# Altium PCB DAC_Board_PCB.PcbDoc
Units mm, origin at the board's own origin, x right, y up, seen from the top; angles counter-clockwise.
Board outline 60 x 23.5 mm, 2 copper layers (Top Layer, Bottom Layer); 37 components, 24 nets, 121 pads, 69 vias.
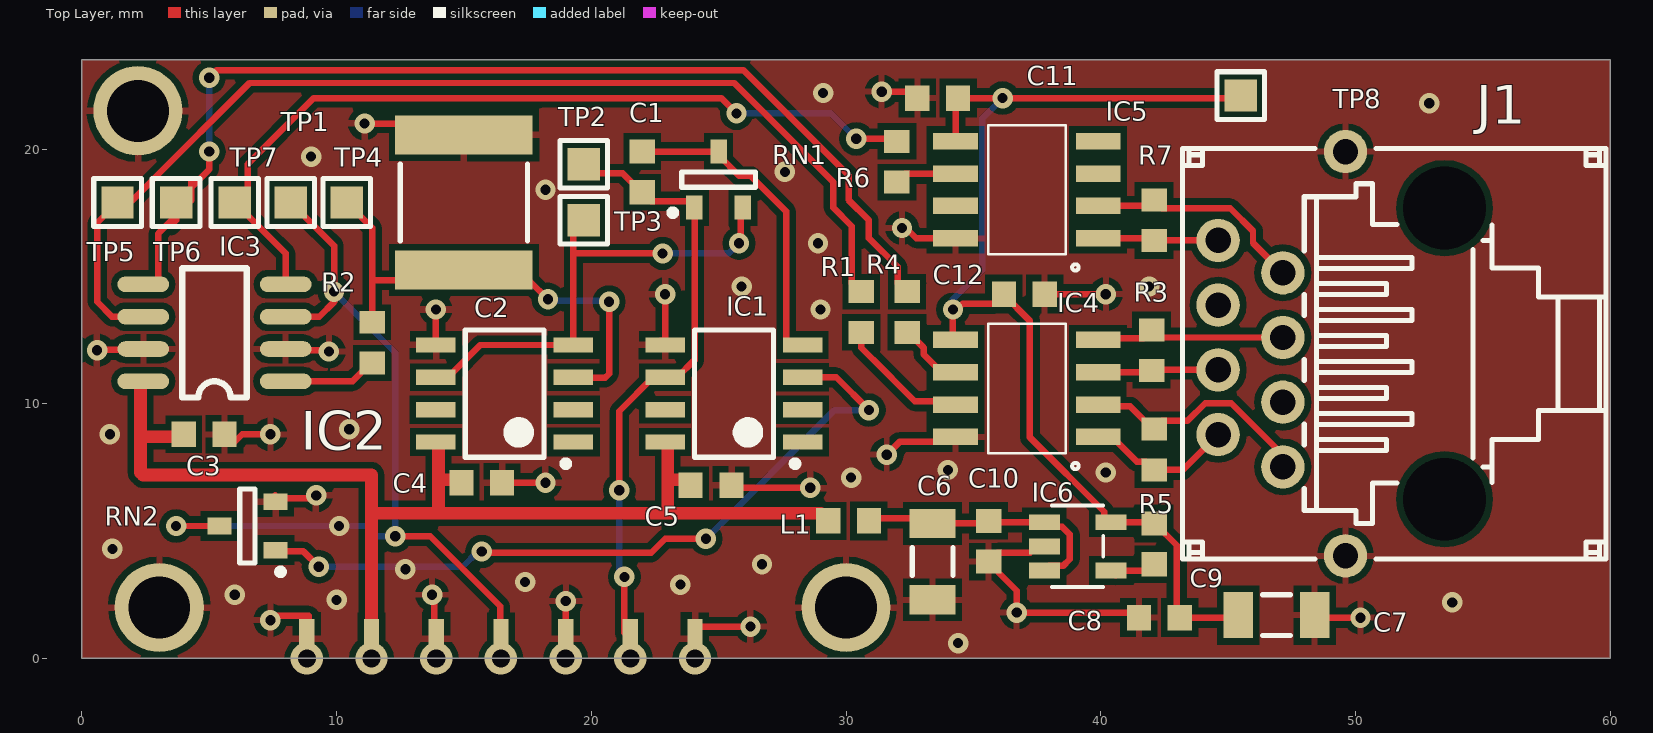
[diagram p0: Top Layer view]
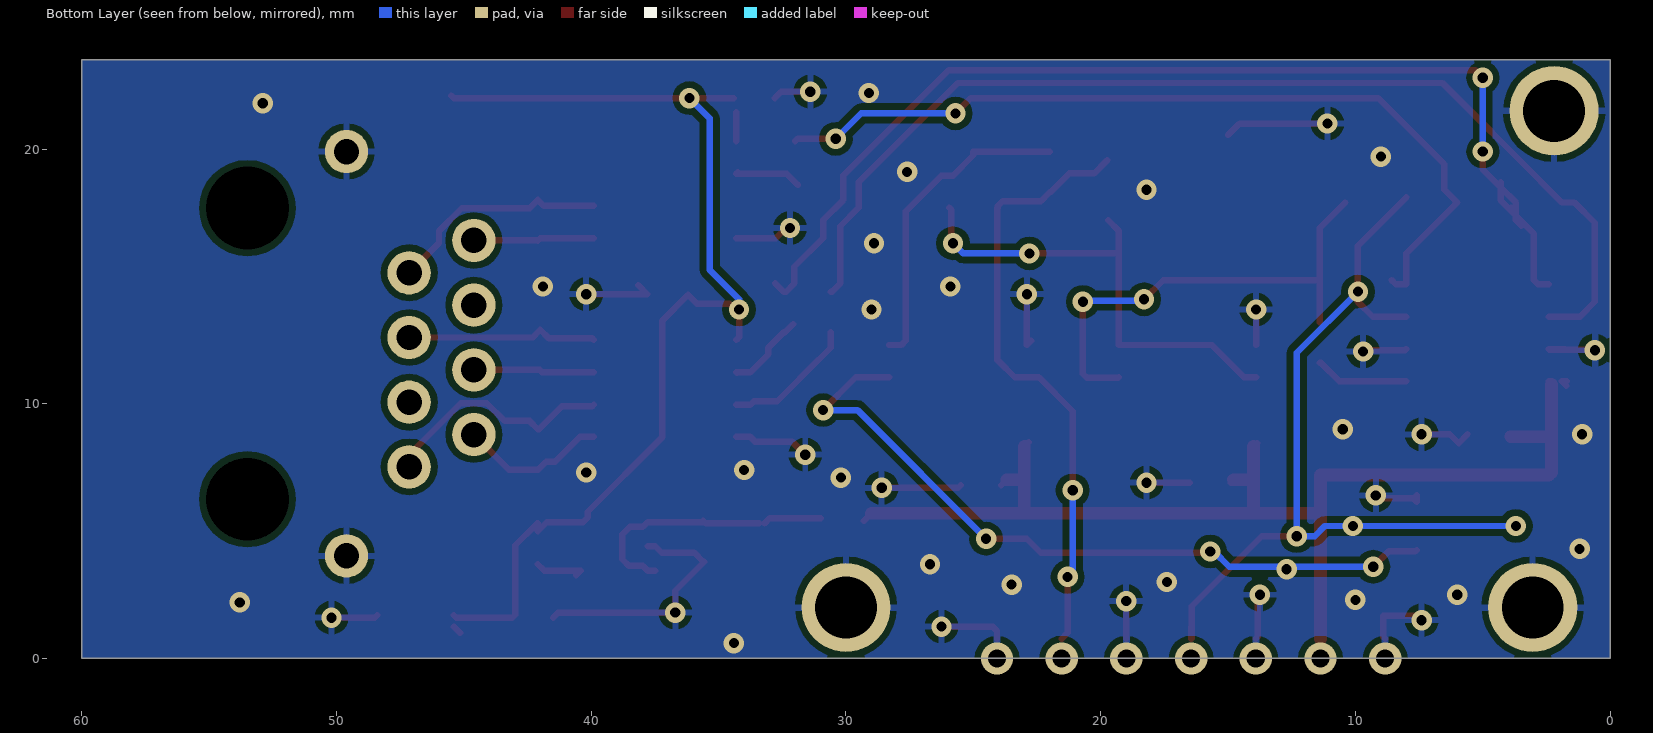
[diagram p1: Bottom Layer view, seen from below]
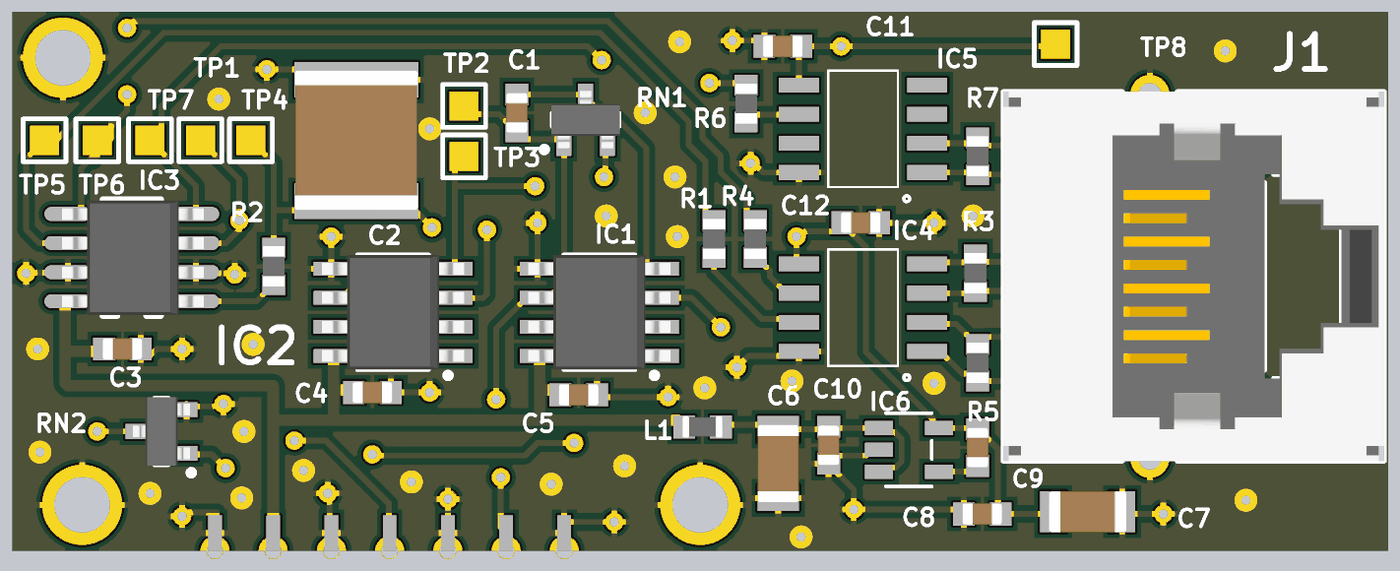
[diagram p2: 3D render of the assembled board from above, using the file's embedded part models]

## Layer stack, top to bottom
Top Solder: solder mask 0.0102, Solder Resist, Dk 3.5
Top Layer: signal copper 0.0356
Dielectric 1: dielectric 0.32, FR-4, Dk 4.8
Bottom Layer: signal copper 0.0356
Bottom Solder: solder mask 0.0102, Solder Resist, Dk 3.5

## Board outline
0,0 60,0 60,23.5 0,23.5

## Design rules (kind name [scope] priority, off if disabled: settings)
Clearance [All] p1: gap=0.254 ignorepadtopadclearanceinfootprint=FALSE except(0: Arc-Hole Track-Hole SMDPad-Hole THPad-Hole Via-Hole Fill-Hole Poly-Hole Region-Hole Text-Hole)
PolygonConnect [All] p1: connectstyle=Relief reliefconductorwidth=0.254 reliefentries=4 polygonreliefangle="90 Angle" airgapwidth=0.254
RoutingVias [All] p1: holewidth=0.711 width=1.27 viastyle="Through Hole" minholewidth=0.711 minwidth=1.27 maxholewidth=0.711 maxwidth=1.27
SolderMaskExpansion [All] p1: expansion=0.102
Width [All] p1: maxlimit=0.254 minlimit=0.254 preferedwidth=0.254
30 further rules are at their usual default settings.

## Components (designator, comment, footprint, x,y, rotation, side; value= is the part's Value field where it differs from the comment)
C1 "8.2pF" CAPC1608X87N 22,19.1 r270 top
C2 "10 uF" CAPC5750X279N 15,17.9 r270 top
C3 "100nF" CAPC1608X87N 4.8,8.8 r180 top
C4 "100nF" CAPC1608X87N 15.7,6.9 r180 top
C5 "100nF" CAPC1608X87N 24.7,6.8 r180 top
C6 "10uF" CAPC3216X180N 33.4,3.8 r90 top
C7 "10uF" CAPC3216X180N 46.9,1.7 r180 top
C8 "100nF" CAPC1608X87N 42.3,1.6 r0 top
C9 "10nF" CAPC1608X87N 42.1,4.5 r90 top
C10 "100nF" CAPC1608X87N 35.6,4.6 r90 top
C11 "100nF" CAPC1608X87N 33.6,22 r0 top
C12 "100nF" CAPC1608X87N 37,14.3 r180 top
IC1 "LT1667" SOIC127P600X175-8N 25.6,10.4 r180 top
IC2 "LT1667" SOIC127P600X175-8N 16.6,10.4 r180 top
IC3 "AD5541" AD5541 5.1,12.3 r180 top
IC4 "FIN1028MX" FIN1028MX 37.1,10.6 r180 top
IC5 "FIN1028MX" FIN1028MX 37.1,18.4 r180 top
IC6 "LT1761ES5-3.3#TRPBF" LDO 39.1,4.4 r0 top
J1 "RJ45" TYCO_6368150-1 45.88,11.965 r90 top
L1 "120R@100MHz" INDC1608X95N 30.1,5.4 r180 top
R1 "100" RESC1608X55N 30.6,13.6 r270 top
R2 "0" RESC1608X55N 11.4,12.4 r90 top
R3 "100" RESC1608X55N 42,12.1 r90 top
R4 "100" RESC1608X55N 32.4,13.6 r270 top
R5 "100" RESC1608X55N 42.1,8.2 r90 top
R6 "100" RESC1608X55N 32,19.5 r270 top
R7 "100" RESC1608X55N 42.1,17.2 r90 top
RN1 "=Value" SOT95P230X112-3N 25,18.8 r90 top
RN2 "=Value" SOT95P230X112-3N 6.5,5.2 r180 top
TP1 "Test Point" TPS127 8.2,17.9 r0 top
TP2 "Test Point" TPS127 19.7,19.4 r0 top
TP3 "Test Point" TPS127 19.7,17.2 r0 top
TP4 "Test Point" TPS127 10.4,17.9 r0 top
TP5 "Test Point" TPS127 1.4,17.9 r0 top
TP6 "Test Point" TPS127 3.7,17.9 r0 top
TP7 "Test Point" TPS127 6,17.9 r0 top
TP8 "Test Point" TPS127 45.5,22.1 r0 top

## Footprints (in the part's own frame and the unit in brackets; to place one, negate y for a bottom-side part, rotate by r counter-clockwise, add the part's x,y. Pads: shape width x height; smd on the part's side, far side on the other; paste and mask are expansions set on the pad)
AD5541 [mil] "AD5541LRZ DAC"
  oval 80x24 smd: 1(-114.17,55.95) 2(-114.17,5.95) 3(-114.17,-44.05) 4(-114.17,-94.05) 5(105.83,-94.05) 6(105.83,-44.05) 7(105.83,5.95) 8(105.83,55.95)
  silkscreen extent -54,-119 46,81, body extent -128,-117 116,80, height 69
CAPC1608X87N [mm] "Chip Capacitor, Body 1.6x0.8mm IPC Medium Density"
  rect 0.95x1 smd: 1(-0.8,0) 2(0.8,0)
  body extent -0.87,-0.47 0.88,0.48, height 0.87
CAPC3216X180N [mm] "Chip Capacitor, Body 3.2x1.6mm, IPC Medium Density"
  rect 1.15x1.8 smd: 1(-1.5,0) 2(1.5,0)
  silkscreen extent -0.55,-0.8 0.55,0.8, body extent -1.7,-0.9 1.7,0.9, height 1.8
CAPC5750X279N [mm] "Chip Capacitor, 2-Leads, Body 5.7x5.0mm, IPC Medium Density"
  rect 1.55x5.4 smd: 1(-2.65,0) 2(2.65,0)
  silkscreen extent -1.5,-2.5 1.5,2.5, body extent -3.05,-2.7 3.05,2.7, height 2.79
FIN1028MX [mm] "LDVS to TTL"
  rect 1.75x0.65 smd: 1(-2.8,1.905) 2(-2.8,0.635) 3(-2.8,-0.635) 4(-2.8,-1.905) 5(2.8,-1.905) 6(2.8,-0.635) 7(2.8,0.635) 8(2.8,1.905)
  silkscreen extent -2.03,-2.54 1.52,3.17
INDC1608X95N [mm] "Chip Inductor, 2-Leads, EIA 0603, Metric 1608, Body 1.6x0.8mm, IPC Medium Density"
  rect 0.95x1 smd: 1(-0.8,0) 2(0.8,0)
  body extent -0.87,-0.47 0.88,0.48, height 0.95
LDO [mm] "3.3 V LDO"
  rect 1.22x0.62 smd: 1(-1.31,0.95) 2(-1.31,0) 3(-1.31,-0.95) 4(1.31,-0.95) 5(1.31,0.95)
  silkscreen extent -1.01,-1.6 1,1.6
RESC1608X55N [mm] "Chip Resistor, EIA 0603, Metric 1608, Body 1.6x0.8mm, IPC Medium Density"
  rect 0.9x1 smd: 1(-0.8,0) 2(0.8,0)
  body extent -0.87,-0.47 0.88,0.48, height 0.55
SOIC127P600X175-8N [mm] "SOIC 8, Pitch 1.27mm - Body 4x5mm, IPC Medium Density"
  rect 1.55x0.6 smd: 1(-2.7,1.905) 2(-2.7,0.635) 3(-2.7,-0.635) 4(-2.7,-1.905) 5(2.7,-1.905) 6(2.7,-0.635) 7(2.7,0.635) 8(2.7,1.905)
  silkscreen extent -2.53,-2.5 1.55,2.88, body extent -3.1,-2.5 3.1,2.5, height 1.75
SOT95P230X112-3N [mm] "SOT23 3-Leads, Pitch 0.95mm - Body 1.3x2.86mm, IPC Medium Density"
  rect 0.95x0.65 smd: 1(-1.1,0.95) 2(-1.1,-0.95) 3(1.1,0)
  silkscreen extent -1.42,-1.45 0.3,1.92, body extent -1.25,-1.5 1.25,1.5, height 1.1
TPS127 [mm] "1.27 x  1.27mm SMD Test Point Area"
  rect 1.27x1.27 smd paste-1.27: 1(0,0)
  silkscreen extent -0.94,-0.94 0.94,0.94
TYCO_6368150-1 [mm] "1 Port RJ45, Straight"
  round 1.7 hole 1: 1(-4.445,-1.27) 2(-3.175,1.27) 3(-1.905,-1.27) 4(-0.635,1.27) 5(0.635,-1.27) 6(1.905,1.27) 7(3.175,-1.27) 8(4.445,1.27) SHIELD(-7.935,-3.73) SHIELD(7.935,-3.73)
  round 0.5 hole 3.25 unplated mask+1.375: M1(5.715,-7.62) M2(-5.715,-7.62)
  silkscreen extent -8.06,-13.96 8.06,2.67, body extent -8.06,-13.96 8.06,2.67, height 16.82

## Part data
C1: library part CC0603_8.2PF_50V_0.5PF_NP0, "Non-polarised capacitor", Case=0603, Manufacturer=GENERIC, Manufacturer1 ComponentHeight=0.87mm, Manufacturer1 Example=PHYCOMP, Manufacturer1 Part Number=223886715828, Tolerance=±0.5pF, Voltage=50V, Author="CERN DEM JLC", Component Type=Standard, CreateDate=03/12/2007, HelpURL=\\cern.ch\dfs\Applications\Altium\Datasheets\CC0603_NP0_PHYCOMP.pdf, LatestRevisionDate=03/12/2007, Manufacturer Part Number=CC0603_8.2PF_50V_0.5PF_NP0, Mounted=Yes, Part Description="SMD Multilayer Chip Ceramic Capacitor", Part Number=CC0603_8.2PF_50V_0.5PF_NP0, Pin Count=2, Sense=No, SMD=Yes, Socket=No, Status=Preferred, TC=C0G/NP0
C2: library part CAPF2220_10uF_35V_20%
C3 C4 C5 C8 C10 C11 C12: library part CC0603_100NF_50V_10%_X7R, "Non-polarised capacitor", Case=0603, Manufacturer=GENERIC, Manufacturer1 ComponentHeight=0.87mm, Manufacturer1 Example=PHYCOMP, Manufacturer1 Part Number=223858615649, Tolerance=±10%, Voltage=50V, Author="CERN DEM JLC", Component Type=Standard, CreateDate=12/3/2007, HelpURL=\\cern.ch\dfs\Applications\Altium\Datasheets\CC0603_X7R_PHYCOMP.pdf, LatestRevisionDate=12/3/2007, Manufacturer Part Number=CC0603_100NF_50V_10%_X7R, Mounted=Yes, Part Description="SMD Multilayer Chip Ceramic Capacitor", Part Number=CC0603_100NF_50V_10%_X7R, Pin Count=2, Sense=No, SMD=Yes, Socket=No, Status=Preferred, TC=X7R
C6 C7: library part CC1206_10UF_25V_10%_X7R, "Non-polarised capacitor", Case=1206, Manufacturer=GENERIC, Manufacturer1 ComponentHeight=1.8mm, Manufacturer1 Example=KEMET, Manufacturer1 Part Number=C1206C106K4RACTU, Manufacturer Part Number=CC1206_10uF_25V_10%_X7R, Tolerance=±10%, Voltage=25V, Author="CERN DEM JLC", Component Type=Standard, CreateDate=12/09/2012, HelpURL=\\cern.ch\dfs\Applications\Altium\Datasheets\CC1206_X7R_KEMET.pdf, LatestRevisionDate=12/09/2012, Mounted=Yes, Part Description="SMD Multilayer Chip Ceramic Capacitor", Part Number=CC1206_10UF_25V_10%_X7R, Pin Count=2, Sense=No, SMD=Yes, Socket=No, Status=Preferred, TC=X7R
C9: library part CC0603_10NF_50V_10%_X7R, "Non-polarised capacitor", Case=0603, Manufacturer=GENERIC, Manufacturer1 ComponentHeight=0.87mm, Manufacturer1 Example=PHYCOMP, Manufacturer1 Part Number=223858615636, Tolerance=±10%, Voltage=50V, Author="CERN DEM JLC", Component Type=Standard, CreateDate=12/3/2007, HelpURL=\\cern.ch\dfs\Applications\Altium\Datasheets\CC0603_X7R_PHYCOMP.pdf, LatestRevisionDate=12/3/2007, Manufacturer Part Number=CC0603_10NF_50V_10%_X7R, Mounted=Yes, Part Description="SMD Multilayer Chip Ceramic Capacitor", Part Number=CC0603_10NF_50V_10%_X7R, Pin Count=2, Sense=No, SMD=Yes, Socket=No, Status=Preferred, TC=X7R
IC1 IC2: "0-5 V Rail to Rail op amp"
IC3: "16 bit serial DAC", Supplier 1=Digi-Key
IC4 IC5: "LVDS to TTL"
IC6: "3.3 V LDO"
J1: library part TYCO_6368150-1, "Connector RJ45 + Shield", Manufacturer="TYCO ELECTRONICS", Manufacturer Part Number=6368150-1, Author="CERN DEM MR", ComponentHeight=17.02mm, Component Type=Standard, CreateDate=6/18/2019, Family=RJ45, HelpURL=\\cern.ch\dfs\Applications\Altium\Datasheets\TYCO_6368150-1.pdf, LatestRevisionDate=6/18/2019, Mounted=Yes, Part Description="RJ45 Connector, 1 Port, 8 Positions, Shielded, Straight, Category 5", Part Number=TYCO_6368150-1, Pin Count=10, PressFit=No, Sense=No, SMD=No, Socket=No, Status=None
L1: library part IND0603_MURATA_BLM18PG121SN1D, "Inductor", Case=0603, Manufacturer=MURATA, Manufacturer Part Number=BLM18PG121SN1D, Power=2A, Resistance=0.05R, Author="CERN DEM BC", ComponentHeight=0.95mm, Component Type=Standard, CreateDate=27/07/2015, HelpURL=\\cern.ch\dfs\Applications\Altium\Datasheets\IND0603_MURATA_BLM18P.pdf, LatestRevisionDate=27/07/2015, Mounted=Yes, Part Description="SMD EMIFIL Chip Ferrite Bead", Part Number=IND0603_MURATA_BLM18PG121SN1D, Pin Count=2, Sense=No, SMD=Yes, Socket=No, Status=None
R1 R3 R4 R5 R6 R7: library part R0603_100R_1%_0.1W_100PPM, "Resistor - 1%", Case=0603, Manufacturer=GENERIC, Manufacturer1 ComponentHeight=0.55mm, Manufacturer1 Example="NIC COMPONENT", Manufacturer1 Part Number=NRC06F4700TRF, Power=0.1W, Tolerance=±1%, Author="CERN DEM JLC", Component Type=Standard, CreateDate=12/3/2007, HelpURL=\\cern.ch\dfs\Applications\Altium\Datasheets\R0603_NIC_NRC.pdf, LatestRevisionDate=3/13/2008, Manufacturer Part Number=R0603_100R_1%_0.1W_100PPM, Mounted=Yes, Part Description="General Purpose Thick Film Chip Resistor", Part Number=R0603_100R_1%_0.1W_100PPM, Pin Count=2, PressFit=No, Sense=No, SMD=Yes, Socket=No, Status=Preferred, TC=±100ppm/°C
R2: library part R0603_0R_JUMPER, "Resistor", Case=0603, Manufacturer=GENERIC, Manufacturer1 ComponentHeight=0.55mm, Manufacturer1 Example="NIC COMPONENT", Manufacturer1 Part Number=NRC06Z0, Author="CERN DEM JLC", Component Type=Standard, CreateDate=12/3/2007, HelpURL=\\cern.ch\dfs\Applications\Altium\Datasheets\R0603_NIC_NRC.pdf, LatestRevisionDate=3/13/2008, Manufacturer Part Number=R0603_0R_JUMPER, Mounted=Yes, Part Description="1A (0.05R Max DC Resistance) Zero Ohm Jumper", Part Number=R0603_0R_JUMPER, Pin Count=2, PressFit=No, Sense=No, SMD=Yes, Socket=No, Status=Preferred
RN1: library part RN_1k_10k_VISHAY_MPMT10011002AT1, "Resistor Network Divider - 0.1%"
RN2: library part RN_1k_20k_VISHAY_MPMT10012002AT1, "Resistor Network Divider - 0.1%"
TP1 TP2 TP3 TP4 TP5 TP6 TP7 TP8: library part SMD_PAD_1.27X1.27MM, Author="CERN DEM JLC", ComponentHeight=0mm, Component Type="Standard (No BOM)", Family="Test Point", HelpURL=Undefined, Mounted=No, PackageDescription="1.27mm x 1.27mm PCB Copper Area (SMD Test Point)", Part Description="1.27mm x 1.27mm PCB Copper Area (SMD Test Point)", Part Number=SMD_PAD_1.27X1.27MM, Pin Count=1, Sense=No, Socket=No, Status=None
  TP1 TP2: CreateDate=12/01/2008, LatestRevisionDate=12/01/2008, SMD=Yes
  TP3 TP4 TP5 TP6 TP7 TP8: CreateDate=1/12/2008, LatestRevisionDate=1/12/2008, SMD=No

## Free pads (board coordinates)
  round 3.5 hole 2.43: 1(2.2,21.5) 1(3.04,2) 1(30,2)
  rect 0.6x1.55 smd: 6(8.832,0.775) 7(11.372,0.775) 8(13.912,0.775) 9(16.452,0.775) 10(18.992,0.775) 11(21.532,0.775) 12(24.072,0.775)

## Via types
v1: diameter 0.8, hole 0.4, Top Layer to Bottom Layer, 62 vias
v2: diameter 1.27, hole 0.711, Top Layer to Bottom Layer, 7 vias

## Nets (pads, with @x,y where several pads share a name; then routed paths per layer and width w, separated by ;. In a path a pad name is that pad's centre, name@x,y a point inside that pad or via, vN(x,y) a via of type N, cw(c..) or ccw(c..) an arc to the next point about the centre after c; other vN are vias at no path point)
GND: C2.1 C3.1 C4.1 C5.1 C6.1 C7.1 C8.1 C10.1 C11.1 C12.1 IC1.5 IC2.5 IC3.2 IC3.7 IC4.8 IC5.8 IC6.2 J1.SHIELD pad.1 pad.6 pad.8 pad.10 pad.12 RN2.2 | length 50.7
  Top Layer w0.254: v1(0.6,12.1) 0.624,12.124 2.388,12.124 IC3.7 IC3.7@1.776,12.149 ; C3.1@5.7,8.7 C3.1 5.6,8.797 5.948,8.449 6.299,8.8 v1(7.4,8.8) v1@7.4,8.74 ; v1(7.4,1.5) 7.577,1.677 8.916,1.677 8.916,0.859 pad.6 ; RN2.2@7.6,6.4 RN2.2 7.746,6.296 9.096,6.296 v1(9.2,6.4) ; IC3.2 8.049,12.099 9.651,12.099 v1(9.7,12.05) ; v1(11.1,21) 14.55,21 C2.1 ; v1(13.75,2.5) 13.831,2.419 13.831,0.856 pad.8 ; IC2.5 v1(13.9,13.7) ; C4.1 v1(18.2,6.9) ; pad.10 18.996,0.779 18.996,2.246 v1(19,2.25) ; IC1.5@22.727,12.478 IC1.5 v1(22.9,14.3) ; pad.12 24.072,1.077 24.245,1.25 v1(26.25,1.25) ; C5.1 25.6,6.7 v1(28.6,6.7) ; v1(31.4,22.25) 32.55,22.25 C11.1 ; v1(31.6,8) 32.1,8.5 33.555,8.5 33.75,8.695 IC4.8 ; v1(32.2,16.9) 32.348,16.9 32.753,16.495 IC5.8 ; C10.1@35.567,3.792 36.7,2.659 v1(36.7,1.8) 41.3,1.8 C8.1 ; C10.1 35.948,4.148 37.238,4.148 37.49,4.4 IC6.2 ; C12.1@38.148,14.648 C12.1 v1(40.2,14.3) ; C7.1 48.5,1.6 v1(50.2,1.6) ; J1.SHIELD@49.61,19.9 J1.SHIELD@49.68,19.97
  other v1: 34.4,0.6 53.8,2.2 10,2.3 6,2.5 23.5,2.9 17.4,3 26.7,3.7 1.2,4.3 30.2,7.1 40.2,7.3 34,7.4 1.1,8.8 10.5,9 29,13.7 25.9,14.6 41.9,14.6 28.9,16.3 18.2,18.4 27.6,19.1 9,19.7 52.9,21.8 29.1,22.2
  other v2: 8.832,0 13.912,0 18.992,0 24.072,0
NetC1_1: C1.1 IC1.4 RN1.3 | length 12.5
  Top Layer w0.254: C1.1 RN1.3 25,19.75 25.808,18.942 26.258,18.942 27.652,17.548 27.652,12.478 27.825,12.305 IC1.4
NetC1_2: C1.2 IC1.6 pad.11 RN1.1 TP2.1 | length 24
  Top Layer w0.254: TP2.1@19.75,19.55 20.258,19.042 21.233,19.042 21.975,18.3 C1.2 22.348,17.952 23.852,17.952 24.05,17.754 RN1.1 24.056,17.694 24.056,11.716 23.375,11.035 IC1.6 22.425,11.035 21.1,9.71 v1(21.1,6.6) ; v1(21.3,3.2) 21.3,1.007 pad.11
  Bottom Layer w0.254: v1(21.1,6.6) 21.1,3.4 v1(21.3,3.2)
  other v2: 21.532,0
NetC6_2: C6.2 C10.2 IC6.1 IC6.3 L1.1 | length 10.4
  Top Layer w0.254: L1.1@31,5.5 33,5.5 C6.2@33.2,5.3 ; C6.2 35.5,5.3 C10.2 35.65,5.35 IC6.1 37.973,5.167 38.482,5.167 38.781,4.868 38.781,3.891 38.523,3.633 37.973,3.633 IC6.3 IC6.3@37.49,3.45
NetC9_1: C9.1 IC6.4 | length 2.1
  Top Layer w0.254: IC6.4@40.593,3.267 IC6.4 41.85,3.45 C9.1
NetIC1_3: IC1.3 RN2.1 | length 29.3
  Top Layer w0.254: RN2.1 7.65,4.2 8.7,4.2 v1(9.3,3.6) ; v1(15.7,4.2) 15.75,4.15 22.35,4.15 22.9,4.7 v1(24.5,4.7) ; IC1.3 29.615,11.035 v1(30.9,9.75)
  Bottom Layer w0.254: v1(9.3,3.6) 14.952,3.6 15.552,4.2 v1(15.7,4.2) ; v1(24.5,4.7) 29.55,9.75 v1(30.9,9.75)
NetIC3_1: IC3.1 R2.1 | length 3.7
  Top Layer w0.254: IC3.1 10.629,10.879 11.35,11.6 R2.1
NetIC4_1: IC4.1 J1.2 R5.1 | length 5.8
  Top Layer w0.254: IC4.1 40.45,8.695 41.422,7.723 41.777,7.723 R5.1 43.22,7.4 J1.2
NetIC4_2: IC4.2 J1.1 R5.2 | length 9.4
  Top Layer w0.254: IC4.2 39.971,9.894 41.156,9.894 42.05,9 R5.2 42.423,9.323 43.402,9.323 44.1,10.021 45.12,10.021 46.873,8.268 46.873,7.797 J1.1
NetIC4_3: IC4.3 J1.4 R3.1 | length 4.7
  Top Layer w0.254: IC4.3 41.935,11.235 R3.1 42.03,11.33 J1.4
NetIC4_4: IC4.4 J1.5 R3.2 | length 7.5
  Top Layer w0.254: IC4.4 39.972,12.577 41.677,12.577 R3.2 42.3,12.6 J1.5
NetIC4_6: IC4.6 R4.2 | length 3.2
  Top Layer w0.254: R4.2@32.077,13.123 R4.2 32.45,12.8 33.044,12.206 33.044,11.941 33.75,11.235 IC4.6 IC4.6@34.29,11.225
NetIC4_7: IC4.7 R1.2 | length 5.2
  Top Layer w0.254: R1.2 30.6,12.2 31.48,11.32 32.15,10.65 32.7,10.1 33.615,10.1 33.75,9.965 IC4.7
NetIC5_1: IC5.1 J1.8 R7.1 | length 4.9
  Top Layer w0.254: IC5.1 42.005,16.495 R7.1 42.11,16.41 J1.8 J1.8@44.518,16.502
NetIC5_2: IC5.2 J1.7 R7.2 | length 8.8
  Top Layer w0.254: IC5.2 41.865,17.765 R7.2 42.423,17.677 45.084,17.677 45.979,16.782 45.979,16.311 J1.7
NetIC5_6: IC5.6 R6.2 | length 2.7
  Top Layer w0.254: R6.2@31.888,18.587 R6.2 32.323,19.023 34.288,19.023 IC5.6 IC5.6@34.243,19.092
P3V3: C7.2 C8.2 C9.2 C11.2 C12.2 IC4.5 IC5.5 IC6.5 TP8.1 | length 44.2
  Top Layer w0.254: IC4.5 34.2,12.605 v1(34.2,13.7) 34.348,13.7 34.575,13.927 35.852,13.927 36.2,14.275 37.223,13.252 37.223,8.677 40.142,5.758 40.142,5.533 40.325,5.35 IC6.5 41.75,5.35 C9.2@42.1,5 ; IC5.5 34.3,21.45 ; C11.2 v1(36.15,22) 45.4,22 TP8.1 ; C9.2 42.125,5.3 42.981,4.444 42.981,1.719 C8.2 45.3,1.6 C7.2 ; C7.2@45.15,1 C7.2@45.4,1.25
  Bottom Layer w0.254: v1(34.2,13.7) 34.2,14.1 35.35,15.25 35.35,21.2 v1(36.15,22)
P5V0: C3.2 C4.2 C5.2 IC1.8 IC2.8 IC3.8 L1.2 pad.7 | length 47
  Top Layer w0.254: IC3.8@1.701,10.879 1.89,10.879 IC3.8@1.726,10.715 ; 2.3,7.3 2.4,7.2 ; IC3.8@2.3,10.767 IC3.8 ; C3.2@3.9,8.7 C3.2 ; IC2.8@13.855,8.45 13.872,8.45 IC2.8@14,8.322 ; C4.2@14.789,7.011 C4.2 ; IC1.8@22.824,8.495 22.827,8.495 IC1.8@23,8.322 ; C5.2@23.689,7.011 C5.2 ; L1.2@29,5.7 L1.2
  Top Layer w0.5: 2.3,7.3 2.3,8.7 ; IC3.8@2.3,10.767 2.3,8.7 ; 2.4,7.2 11.372,7.2 11.372,5.7 ; C3.2@3.9,8.7 2.3,8.7 ; pad.7 11.372,5.7 ; IC2.8@14,8.322 14,7.011 ; C4.2@14.789,7.011 14,7.011 ; IC1.8@23,8.322 23,7.011 ; C5.2@23.689,7.011 23,7.011 ; L1.2@29,5.7 23,5.7 ; 11.372,5.7 14,5.7 ; 14,5.7 23,5.7 ; 14,5.7 14,7.011 ; 23,5.7 23,7.011
  other v2: 11.372,0
REF_3V3: IC3.3 pad.9 RN2.3 TP1.1 | length 35.1
  Top Layer w0.254: v1(3.7,5.2) RN2.3 ; IC3.3 8.007,13.411 9.314,13.411 9.9,13.997 v1(9.9,14.4) 9.9,16.2 TP1.1 TP1.1@8,18.1 ; v1(12.3,4.8) 13.682,4.8 16.428,2.054 16.428,0.799 pad.9 pad.9@16.452,1.25
  Bottom Layer w0.254: v1(3.7,5.2) 11.2,5.2 11.6,4.8 v1(12.3,4.8) 12.3,12 v1(9.9,14.4)
  other v2: 16.452,0
SPI_CS: IC3.4 R6.1 TP7.1 | length 33.7
  Top Layer w0.254: IC3.4@8.584,14.853 8.42,14.689 IC3.4 8,15.9 TP7.1 6.508,18.408 6.508,19.408 9.1,22 25.1,22 v1(25.7,21.4) ; v1(30.4,20.4) 31.9,20.4 R6.1
  Bottom Layer w0.254: v1(25.7,21.4) 29.4,21.4 v1(30.4,20.4)
SPI_MOSI: IC3.6 R1.1 TP5.1 | length 42.7
  Top Layer w0.254: IC3.6 1.181,13.419 0.6,14 0.6,17.1 TP5.1 1.9,17.9 2.684,18.684 2.684,18.693 6.583,22.592 25.613,22.592 29.5,18.705 29.5,17.7 30.227,16.973 30.227,14.723 30.55,14.4 R1.1
SPI_SCLK: IC3.5 R4.1 TP6.1 | length 44.9
  Top Layer w0.254: IC3.5 2.832,14.689 2.996,14.853 2.996,16.68 TP6.1@3.7,17.384 ; 3.49,16.99 3.7,17.2 TP6.1@3.7,17.384 ; TP6.1@3.89,17.56 TP6.1@3.89,17.574 ; 4.3,18.7 TP6.1@4.3,18.5 ; v1(5,19.9) 5,19.2 4.4,18.6 TP6.1@4.3,18.5 ; v1(5,22.8) 5.3,23.1 25.97,23.1 30.1,18.97 30.1,18 30.9,17.2 30.9,16.5 32.027,15.373 32.027,14.723 32.35,14.4 R4.1 32.45,14.4 R4.1@32.773,14.723 ; TP6.1@3.7,17.384 TP6.1@3.7,17.5 ; TP6.1@3.7,17.384 TP6.1@3.89,17.574 ; TP6.1@3.7,17.5 3.89,17.69 TP6.1@3.89,17.574 ; TP6.1@3.7,17.5 TP6.1 TP6.1@4.3,18.5 ; TP6.1@3.89,17.574 4.3,17.984 TP6.1@4.3,18.5
  Bottom Layer w0.254: v1(5,19.9) v1(5,22.8)
v_DAC: C2.2 IC2.3 R2.2 TP4.1 | length 19.1
  Top Layer w0.254: TP4.1 11.4,16.9 11.4,14.85 ; R2.2 11.4,14.85 ; v1(18.3,14.1) 17.55,14.85 11.4,14.85 ; IC2.3 19.315,11.02 20.539,11.02 20.7,11.18 v1(20.7,14)
  Bottom Layer w0.254: v1(18.3,14.1) 18.35,14.05 20.65,14.05 v1(20.7,14)
V_offset: IC2.4 IC2.6 TP3.1 | length 19.1
  Top Layer w0.254: IC2.6 14.375,11.035 15.645,12.305 IC2.4 19.3,15.9 ; TP3.1 19.3,16.8 19.3,15.9 ; v1(22.8,15.9) 19.3,15.9 ; v1(25.8,16.3) 25.875,16.375 25.875,17.625 25.95,17.7
  Bottom Layer w0.254: v1(22.8,15.9) 25.4,15.9 v1(25.8,16.3)
pads on no net: IC1.1 IC1.2 IC1.7 IC2.1 IC2.2 IC2.7 IC5.3 IC5.4 IC5.7 J1.3 J1.6 J1.M1 J1.M2 RN1.2
copper on no net:
  other v1: 12.7,3.5 10.1,5.2

## Polygon pours and split planes (outlines as drawn)
GND on Bottom Layer (solid, pour order 24): 0,23.5 0,0 60,0 60,23.5
GND on Top Layer (solid, pour order 26): 0,23.5 60,23.5 60,0 0,0